# EAGLE board interfaceB-robot (EAGLE 7.1.0)
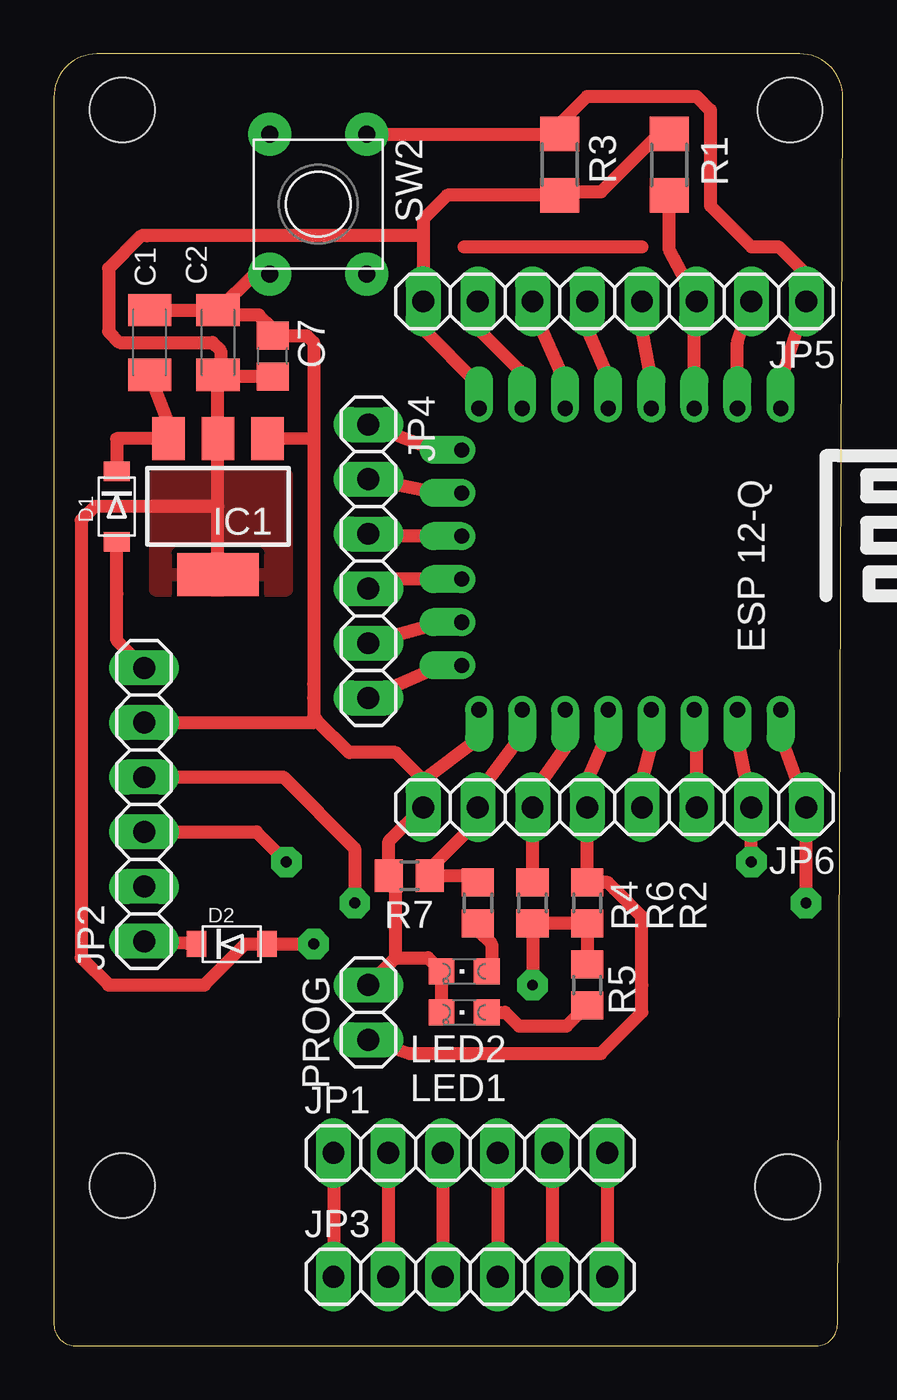
[diagram p0: board, top side]
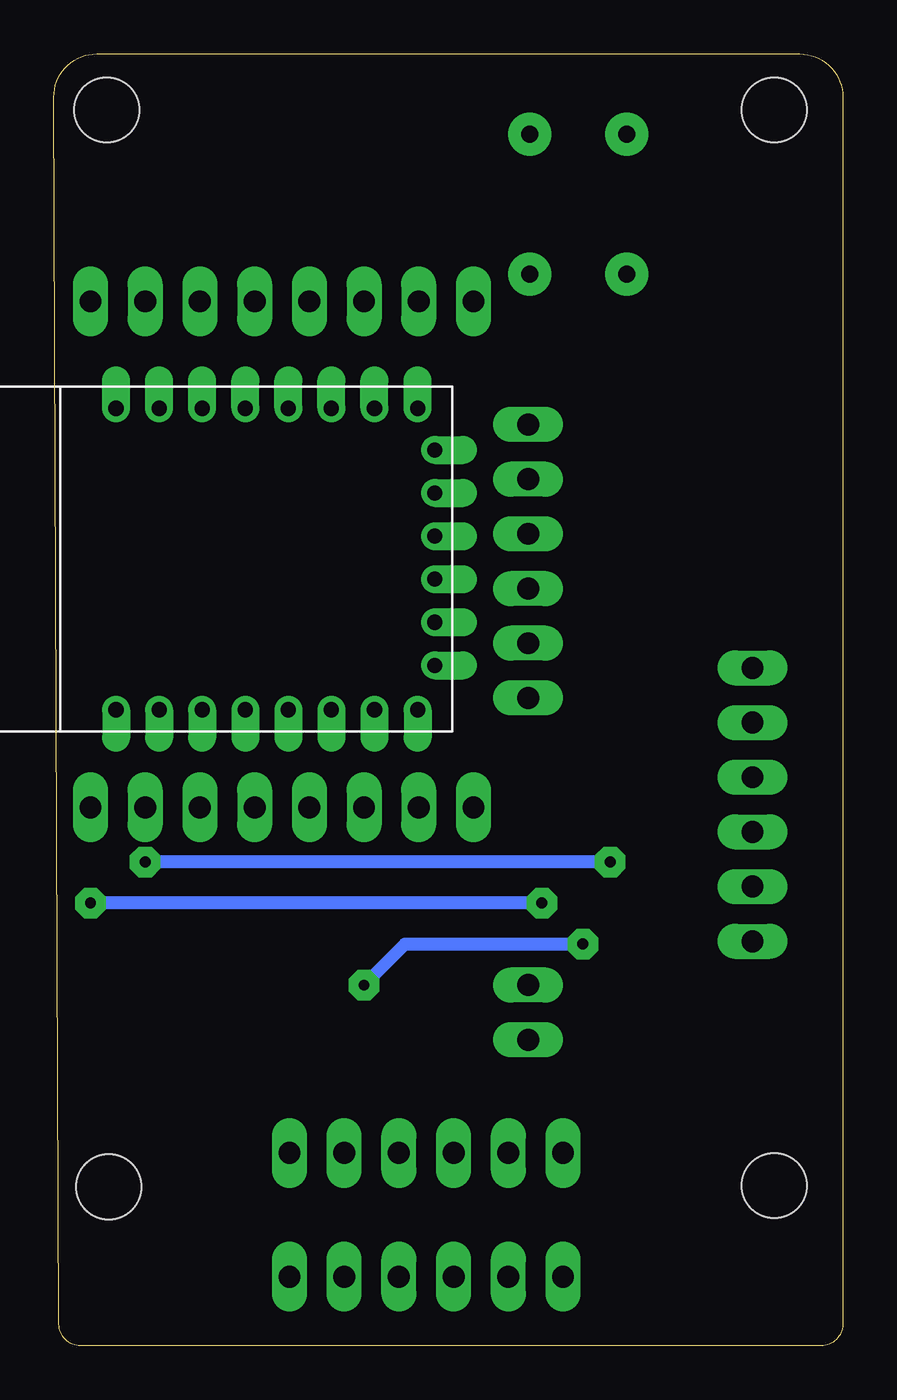
[diagram p1: board, bottom side, seen from below]

Size 36.63 x 60 mm. Coordinates in mm from the lower left corner, seen from the top.
Outline: 34.63,60 2,60 arc90 0,57.98 0,0.98 arc90 1,0 35.39,0 arc90 36.39,1 36.63,57.99 arc90 34.63,60
Copper layers (1*16): Top 0.035mm / dielectric 1.5mm / Bottom 0.035mm
Design rules "default *": minimum track width 10mil, minimum drill 24mil, track to track 0.3mm, track to pad 0.3mm, pad to pad 8mil, via to via 8mil, smd to smd 8mil, copper to edge 40mil, drill to drill 8mil, minimum pad ring 12mil, minimum via ring 18mil, stop-mask expansion 4mil, vias tented up to drill 0mil, thermal gap 10mil
Holes 3 mm at 3.17,57.39 34.17,57.39 34.07,7.38 3.17,7.44

## Footprints (pad centres in the part's own frame; a part is rotated, then mirrored left to right if it is on the bottom)
C1206K = smd 1.5 x 2: 1 -1.5,0; 2 1.5,0
C0805 = smd 1.3 x 1.5: 1 -0.95,0; 2 0.95,0
SOD-123FL = smd 0.91 x 1.22: A 1.637,0; C -1.637,0
SOT223 = smd 1.5 x 2: 1 -2.3,-3.15; 2 0,-3.15; 3 2.3,-3.15 | smd 3.8 x 2: 4 0,3.15
1X06 = drill 1.016 long: 1 -6.35,0; 2 -3.81,0; 3 -1.27,0; 4 1.27,0; 5 3.81,0; 6 6.35,0
1X08 = drill 1.016 long: 1 -8.89,0; 2 -6.35,0; 3 -3.81,0; 4 -1.27,0; 5 1.27,0; 6 3.81,0; 7 6.35,0; 8 8.89,0
CHIPLED_0805 = smd 1.2 x 1.2: A 0,-1.05; C 0,1.05
ESP12Q = drill 0.7 offset: ADC -7.1,3.8; CH_PD -7.1,1.8; CS0 -5.165,-9.005; GND 6.9,-8.2; GPIO0 6.9,-2.2; GPIO2 6.9,-4.2; GPIO4 6.9,1.8; GPIO5 6.9,-0.2; GPIO9 -1.165,-9.005; GPIO10 0.835,-9.005; GPIO12 -7.1,-4.2; GPIO13 -7.1,-6.2; GPIO14 -7.1,-2.2; GPIO15 6.9,-6.2; GPIO16 -7.1,-0.2; MISO -3.165,-9.005; MOSI 2.835,-9.005; RESET -7.1,5.8; RX 6.9,3.8; SCLK 4.835,-9.005; TX 6.9,5.8; VCC -7.1,-8.2
1X02 = drill 1.016 long: 1 -1.27,0; 2 1.27,0
R1206 = smd 1.6 x 1.803: 1 -1.422,0; 2 1.422,0
R0805 = smd 1.3 x 1.5: 1 -0.95,0; 2 0.95,0
SW45-65 = drill 0.8 pad 2: 1 0,-5; 2 6.5,-5; 3 6.5,-0.5; 4 0,-0.5

## Placement (x,y rotation side)
C1  100n  [C1206K]  4.44,46.59 90 top
C2  10u  [C1206K]  7.62,46.59 90 top
C7  100n  [C0805]  10.16,45.96 90 top
D1  [SOD-123FL]  2.92,38.98 270 top
D2  [SOD-123FL]  8.25,18.66 0 top
IC1  LD117AS33TR  [SOT223]  7.62,38.98 180 top
JP1  [1X06]  19.33,8.95 0 top
JP2  [1X06]  4.19,25.13 90 top
JP3  [1X06]  19.33,3.2 0 top
JP4  [1X06]  14.6,36.44 270 top
JP5  [1X08]  26.03,48.5 180 top
JP6  [1X08]  26.03,25.01 180 top
LED1  [CHIPLED_0805]  19.05,15.48 90 top
LED2  [CHIPLED_0805]  19.05,17.38 90 top
M1  ESP12Q  [ESP12Q]  27.94,36.44 270 top
PROG  [1X02]  14.6,15.48 270 top
R1  [R1206]  28.57,54.85 90 top
R2  [R0805]  24.76,20.56 270 top
R3  [R1206]  23.49,54.85 270 top
R4  [R0805]  19.68,20.56 270 top
R5  [R0805]  24.76,16.75 270 top
R6  [R0805]  22.22,20.56 270 top
R7  [R0805]  16.51,21.83 180 top
SW2  [SW45-65]  9.52,49.77 90 top

## Library data of the parts
C1 C2 C7 R1-R7 = rcl
D1 D2 LED1 LED2 = adafruit
IC1 = v-reg
JP1-JP6 PROG = pinhead
M1 = esp826612q
SW2 = rolf_lib1

## Nets
+5V: D1.A JP2.6
D0: JP5.4 M1.GPIO16
D1: JP6.4 M1.GPIO5
D2: JP6.3 M1.GPIO4
D3: JP6.5 M1.GPIO0 PROG.2 R2.1
D4: JP6.6 M1.GPIO2 R6.1
D5: JP5.5 M1.GPIO14
D6: JP5.6 M1.GPIO12
D7: JP5.7 M1.GPIO13
D8: JP6.7 M1.GPIO15 R4.1 R7.1
GND: C1.2 C2.2 C7.2 IC1.1 JP2.5 JP6.8 LED1.C LED2.C M1.GND PROG.1 R7.2 SW2.4
N$1: C1.1 D1.C IC1.3
N$2: JP5.2 M1.ADC
N$4: JP1.1 JP3.1
N$5: D2.C JP2.1
N$6: JP1.2 JP3.2
N$7: JP1.3 JP3.3
N$8: JP1.4 JP3.4
N$9: JP1.5 JP3.5
N$10: JP1.6 JP3.6
N$14: LED1.A R5.2
N$15: LED2.A R4.2
N$20: JP4.1 M1.CS0
N$21: JP4.2 M1.MISO
N$22: JP4.3 M1.GPIO9
N$23: JP4.4 M1.GPIO10
N$24: JP4.5 M1.MOSI
N$26: JP4.6 M1.SCLK
PD: JP5.3 M1.CH_PD R1.1
RESET: JP5.1 M1.RESET R3.1 SW2.2
RX: JP2.3 JP6.2 M1.RX
TX: JP2.4 JP6.1 M1.TX
V3V: C2.1 C7.1 D2.A IC1.4 JP5.8 M1.VCC R1.2 R2.2 R3.2 R5.1 R6.2

## Tracks (layer width: path | path; a pad name or v marks a point on that pad's centre or on a via)
+5V
  Top 0.61: JP2.6 2.92,32.75 2.92,34.91 D1.A
D0
  Top 0.61: M1.GPIO16 27.74,44.89 27.3,47.23 JP5.4
D1
  Top 0.61: M1.GPIO5 27.74,27.98 27.3,26.27 JP6.4
D2
  Top 0.61: JP6.3 29.84,29.43 M1.GPIO4
D3
  Top 0.61: M1.GPIO0 25.74,28.52 24.76,26.27 JP6.5 24.76,23.1 24.76,22.47 R2.1 25.72,21.51 26.03,21.2 27.3,19.92 27.3,16.75 27.3,15.48 25.4,13.57 18.41,13.57 16.51,13.57 PROG.2
D4
  Top 0.61: M1.GPIO2 23.74,27.79 22.22,25.64 JP6.6 22.22,23.1 22.22,22.47 R6.1
D5
  Top 0.61: M1.GPIO14 25.74,44.98 24.76,47.23 JP5.5
D6
  Top 0.61: M1.GPIO12 23.49,45.33 22.47,47.62 JP5.6
D7
  Top 0.61: M1.GPIO13 21.74,44.54 21.59,45.33 19.68,47.23 JP5.7
D8
  Top 0.61: M1.GPIO15 21.59,29.38 21.59,28.18 19.68,25.64 JP6.7 19.68,24.37 17.46,22.15 R7.1 19.36,21.83 R4.1
GND
  Top 0.61: M1.GND 19.77,29.53 19.77,28.27 19.68,28.18 17.14,26.27 | 17.14,26.27 JP6.8 15.56,23.42 R7.2 15.87,21.51 15.87,19.92 15.87,18.02 | 10.16,42.78 10.16,42.37 IC1.1 12.06,42.15 | 17.14,26.27 15.87,27.55 13.72,27.55 12.19,29.07 | PROG.1 15.87,18.02 | 12.06,42.15 12.06,30.72 12.06,30.09 12.06,29.2 12.19,29.07 | LED1.C LED2.C 17.36,18.02 15.87,18.02 | C1.2 C2.2 | SW2.4 9.29,49.77 C2.2 | C2.2 7.85,47.87 9.52,47.87 10.16,47.23 C7.2 11.75,46.91 12.06,46.59 12.06,42.15 | JP2.5 12.06,28.94 12.19,29.07
N$1
  Top 0.61: C1.1 5.32,42.87 IC1.3 2.91,42.12 D1.C
N$2
  Top 0.61: M1.ADC 31.74,46.59 JP5.2
N$3
  Top 0.61: 19.05,51.04 27.3,51.04
N$4
  Top 0.61: JP1.1 JP3.1
N$5
  Top 0.61: D2.C JP2.1
N$6
  Top 0.61: JP1.2 JP3.2
N$7
  Top 0.61: JP1.3 JP3.3
N$8
  Top 0.61: JP1.4 JP3.4
N$9
  Top 0.61: JP1.5 JP3.5
N$10
  Top 0.61: JP1.6 JP3.6
N$14
  Top 0.61: LED1.A 20.95,15.48 21.59,14.84 23.81,14.84 R5.2
N$15
  Top 0.61: R4.2 19.68,19.29 20.32,18.66 20.32,17.6 LED2.A
N$20
  Top 0.61: M1.CS0 17.69,41.6 JP4.1
N$21
  Top 0.61: M1.MISO 17.79,39.6 JP4.2
N$22
  Top 0.61: M1.GPIO9 14.07,37.6 JP4.3
N$23
  Top 0.61: M1.GPIO10 14.4,35.6 JP4.4
N$24
  Top 0.61: M1.MOSI 18.12,33.6 JP4.5
N$26
  Top 0.61: M1.SCLK 18.02,31.6 JP4.6
PD
  Top 0.61: M1.CH_PD 29.74,47.34 JP5.3 28.57,50.89 R1.1
RESET
  Top 0.61: M1.RESET 33.74,44.77 JP5.1 34.92,49.77 33.65,51.04 32.38,51.04 30.48,52.94 30.48,57.39 29.84,58.03 24.76,58.03 23.49,56.75 R3.1 SW2.2
RX  (via drill 0.5)
  Top 0.61: M1.RX 31.74,28.17 JP6.2 v32.38,22.47 | JP2.3 9.4,23.86 v10.79,22.47
  Bottom 0.61: v10.79,22.47 v32.38,22.47
TX  (via drill 0.5)
  Top 0.61: M1.TX 33.74,28.27 JP6.1 v34.92,20.56 | JP2.4 10.67,26.4 13.97,23.1 v13.97,20.56
  Bottom 0.61: v13.97,20.56 v34.92,20.56
V3V  (via drill 0.5)
  Top 0.406: R1.2 28.09,56.27 | 23.65,53.58 R3.2
  Top 0.61: v22.22,16.75 R6.2 R2.2 R5.1 | v12.06,18.66 10.79,18.66 D2.A 8.89,18.66 6.98,16.75 2.54,16.75 1.27,18.02 1.27,38.34 1.9,38.98 7.62,38.98 | 28.09,56.27 25.4,53.58 23.65,53.58 | R3.2 18.26,53.43 17.14,52.31 17.14,51.55 | 17.14,51.55 JP5.8 17.14,47.87 17.14,47.23 19.68,44.69 19.74,44.63 M1.VCC | 7.62,38.98 IC1.4 7.62,38.98 | 7.62,38.98 C2.1 7.7,45.01 | C7.1 7.7,45.01 | 17.14,51.55 4.32,51.55 4.06,51.55 2.54,50.02 2.54,47.1 3.05,46.59 7.37,46.59 7.75,46.21 7.75,45.33 | 7.75,45.33 7.75,45.07 | 7.7,45.01 7.7,45.28 7.75,45.33
  Bottom 0.61: v22.22,16.75 20.32,18.66 v12.06,18.66
  pour Top: 4.71,35.1 10.81,35.1 10.81,40.43 4.71,40.43